# EAGLE board laserpcbpower (EAGLE 5.11)
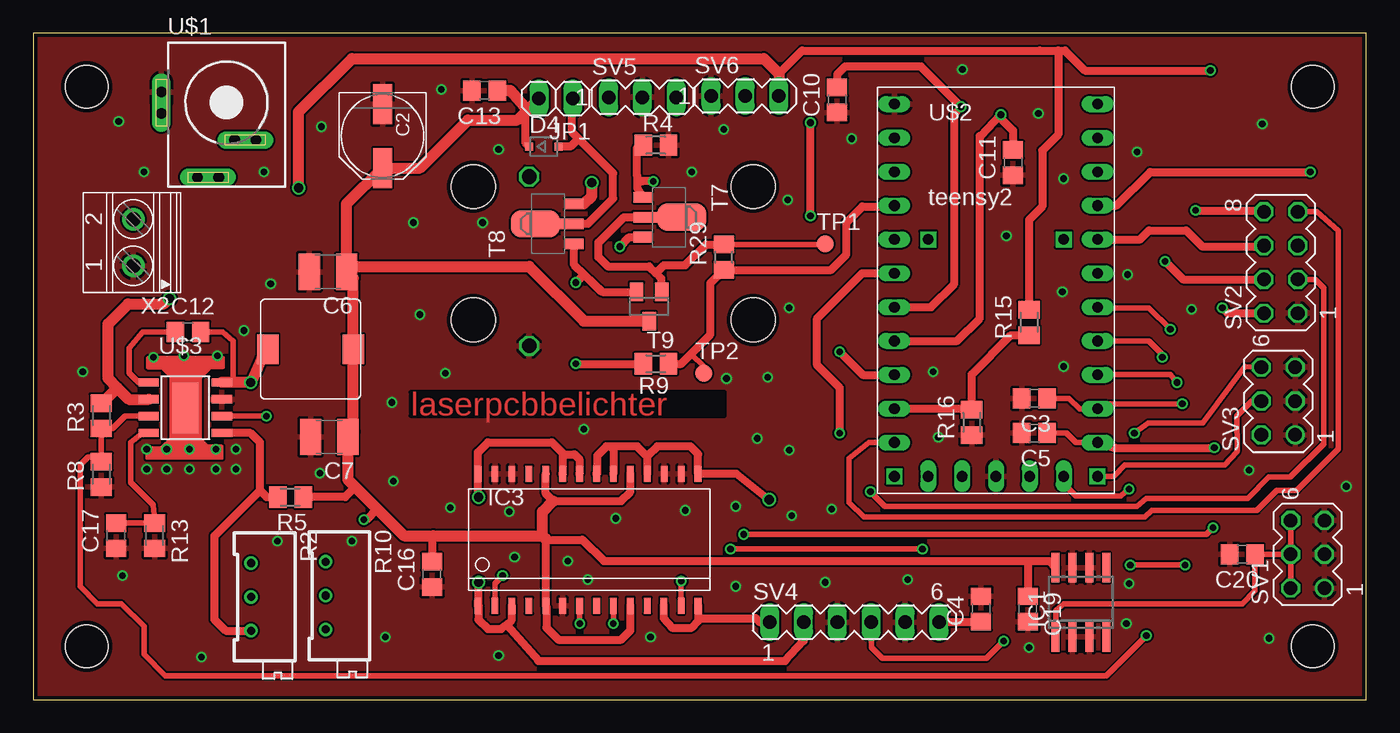
[diagram p0: board, top side]
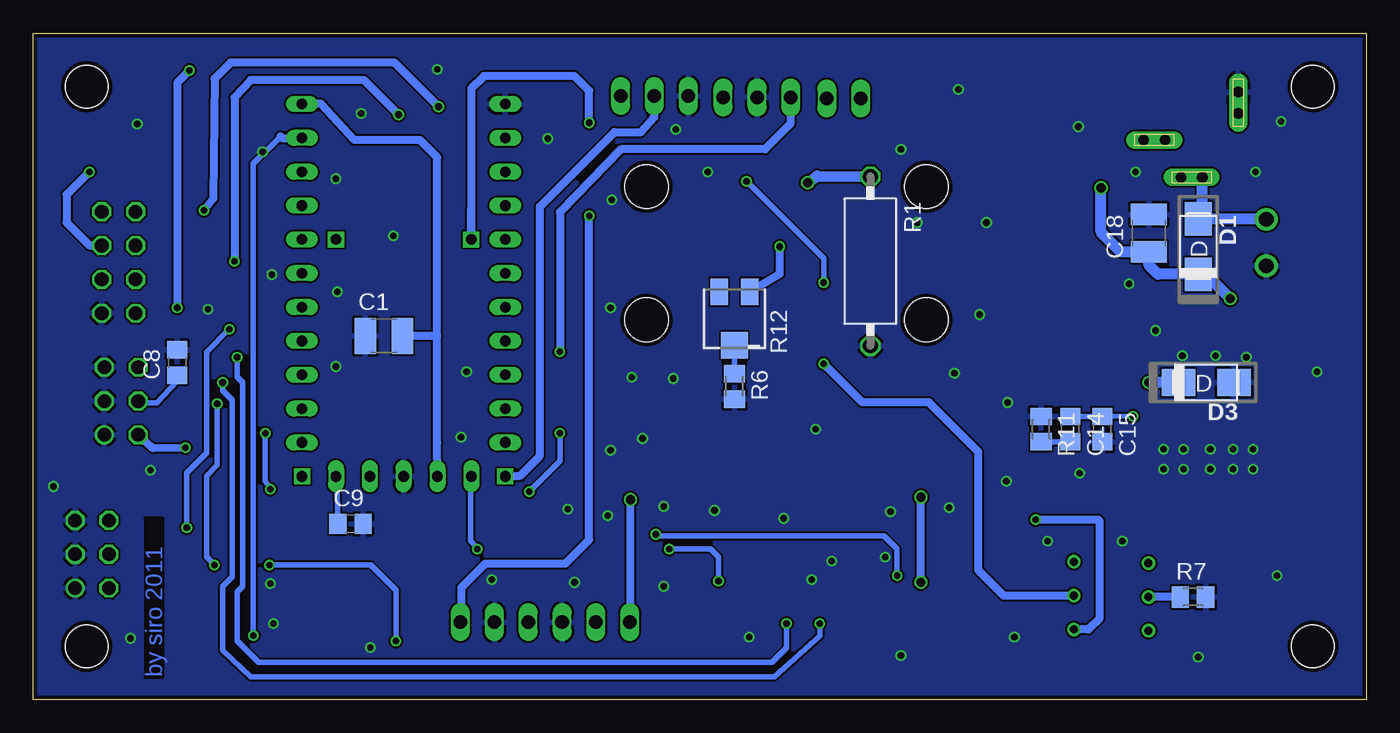
[diagram p1: board, bottom side, seen from below]

Size 100 x 50 mm. Coordinates in mm from the lower left corner, seen from the top.
Outline: 0,0 100,0 100,50 0,50 0,0
Copper layers (1*16): Top 0.035mm / dielectric 1.5mm / Bottom 0.035mm
Design rules "PCB-POOL Standard": minimum track width 0.15mm, minimum drill 0.3mm, track to track 0.15mm, track to pad 0.15mm, pad to pad 0.15mm, via to via 0.15mm, smd to smd 0.15mm, copper to edge 0.3mm, drill to drill 0.2mm, minimum pad ring 0.2mm, minimum via ring 0.15mm, stop-mask expansion 0.075mm, vias tented up to drill 0mil, thermal gap 0.2mm
Holes 3.2 mm at 96,4 96,46 4,46 4,4
Holes 3.3 mm at 33,28.5 33,38.5 54,38.5 54,28.5

## Footprints (pad centres in the part's own frame; a part is rotated, then mirrored left to right if it is on the bottom)
C1210 = smd 1.6 x 2.7: 1 -1.4,0; 2 1.4,0
PANASONIC_D = smd 3 x 1.4: + 2.4,0; - -2.4,0
C0805 = smd 1.3 x 1.5: 1 -0.95,0; 2 0.95,0
DSMA = smd 2.5 x 2: A -2.083,0; C 2.083,0
SOD323-R = smd 0.6 x 0.6: A 1.1,0; C -1.1,0
SO08 = smd 0.6 x 2.2: 1 -1.905,-2.6; 2 -0.635,-2.6; 3 0.635,-2.6; 4 1.905,-2.6; 5 1.905,2.6; 6 0.635,2.6; 7 -0.635,2.6; 8 -1.905,2.6
P-DSO-28-14 = smd 0.5 x 1.2: P$1 -8.34,-4.95; P$2 -7.07,-4.95; P$3 -5.8,-4.95; P$4 -4.53,-4.95; P$5 -3.26,-4.95; P$6 -1.99,-4.95; P$7 -0.72,-4.95; P$8 0.55,-4.95; P$9 1.82,-4.95; P$10 3.09,-4.95; P$11 4.36,-4.95; P$12 5.59,-4.95; P$13 6.9,-4.95; P$14 8.17,-4.95; P$15 8.17,4.95; P$16 6.9,4.95; P$17 5.63,4.95; P$18 4.36,4.95; P$19 3.09,4.95; P$20 1.82,4.95; P$21 0.55,4.95; P$22 -0.72,4.95; P$23 -1.99,4.95; P$24 -3.26,4.95; P$25 -4.53,4.95; P$26 -5.8,4.95; P$27 -7.07,4.95; P$28 -8.34,4.95
1X02 = drill 1.016 long: 1 -1.27,0; 2 1.27,0
PIS28XX = smd 1.6 x 2.2: 1 -3.2,0; 2 3.2,0
VMTB60 = drill 1.1 octagon: 1 -6.35,0; 2 6.35,0
RTRIM64X = drill 0.61 round: 1 1.27,-2.54; 2 1.27,0; 3 1.27,2.54
M0805 = smd 1.3 x 1.6: 1 -0.95,0; 2 0.95,0
SM-42/43A = smd 2 x 1.3: 1 2,1.15; 3 2,-1.15 | smd 2 x 2: 2 -2,0
R0805 = smd 1.3 x 1.5: 1 -0.95,0; 2 0.95,0
MA03-2 = drill 1.016 round: 1 -2.54,-1.27 | drill 1.016 octagon: 2 -2.54,1.27; 3 0,-1.27; 4 0,1.27; 5 2.54,-1.27; 6 2.54,1.27
MA04-2 = drill 1.016 octagon: 1 -3.81,-1.27; 2 -3.81,1.27; 3 -1.27,-1.27; 4 -1.27,1.27; 5 1.27,-1.27; 6 1.27,1.27; 7 3.81,-1.27; 8 3.81,1.27
MA06-1 = drill 1.016 long: 1 -6.35,0; 2 -3.81,0; 3 -1.27,0; 4 1.27,0; 5 3.81,0; 6 6.35,0
MA03-1 = drill 1.016 long: 1 -2.54,0; 2 0,0; 3 2.54,0
SOT89-BCE = smd 0.8 x 1.4: B -1.499,-1.981; E 1.499,-1.981 | smd 0.8 x 1.9: C 0,-1.727 | smd 2.032 x 3.65: C@1 0,0.94
SOT23 = smd 1 x 1.4: 1 -0.95,-1.1; 2 0.95,-1.1; 3 0,1.1
B1,27 = smd 1.27 x 1.27: TP 0,0
KLDVX-0202-B = drill 0.8 pad 1.4 long: 1 -4.9,0.8; 1@1 -4.9,-0.8 | drill 0.8 pad 1.3 long: 2 -2.2,-5.6; 2@1 -0.6,-5.6; 3 0.6,-2.8; 3@1 2.2,-2.8
TEENSY2 = drill 0.8 long: GND 12.7,21.59; PB0 12.7,19.05; PB1 12.7,16.51; PB2 12.7,13.97; PB3 12.7,11.43; PB4 27.94,-1.27; PB5 27.94,1.27; PB6 27.94,3.81; PB7 12.7,8.89; PC6 12.7,-3.81; PD0 12.7,6.35; PD1 12.7,3.81; PD2 12.7,1.27; PD3 12.7,-1.27; PD4 25.4,-6.35; PD5 15.24,-6.35; PD7 27.94,-3.81; PF0 27.94,19.05; PF1 27.94,16.51; PF4 27.94,13.97; PF5 27.94,11.43; PF6 27.94,8.89; PF7 27.94,6.35; PGND2 20.32,-6.35; PVCC2 17.78,-6.35; RST 22.86,-6.35; VCC 27.94,21.59 | drill 0.8 square: PAREF 25.4,11.43; PC7 12.7,-6.35; PD6 27.94,-6.35; PE6 15.24,11.43
SO8-COOL = smd 0.61 x 1.524: 1 -1.905,-2.743; 2 -0.635,-2.743; 3 0.635,-2.743; 4 1.905,-2.743; 5 1.905,2.743; 6 0.635,2.743; 7 -0.635,2.743; 8 -1.905,2.743 | smd 3.81 x 1.93: EXT 0,0
1751248 = drill 1.1 pad 1.7 round: 1 -1.75,-0.1; 2 1.75,-0.1

## Placement (x,y rotation side)
C1  X5R-G1210 22  [C1210]  73.7,27.3 0 bottom
C2  22µ  [PANASONIC_D]  26.2,42.3 270 top
C3  100n  [C0805]  75.1,22.6 180 top
C4  100n  [C0805]  71.1,6.8 90 top
C5  100n  [C0805]  75.1,20 180 top
C6  22µ X7R  [C1210]  22.1,32.1 180 top
C7  22µ X7R  [C1210]  22.2,19.7 180 top
C8  100n  [C0805]  89.2,25.3 90 bottom
C9  100n  [C0805]  76.2,13.2 0 bottom
C10  100n  [C0805]  60.3,45 90 top
C11  100n  [C0805]  73.5,40.3 90 top
C12  100n  [C0805]  11.6,27.6 0 top
C13  X5R-G0805 100n  [C0805]  33.85,45.7 180 top
C14  180p  [C0805]  22.2,20.3 270 bottom
C15  12p  [C0805]  19.8,20.3 270 bottom
C16  100n  [C0805]  29.9,9.4 90 top
C17  15n  [C0805]  6.2,12.3 90 top
C18  10µ X7R  [C1210]  16.3,35 90 bottom
C19  100n  [C0805]  74.6,6.8 270 top
C20  100n  [C0805]  90.7,10.9 180 top
D1  [DSMA]  12.6,34 270 bottom
D3  B320A  [DSMA]  12,23.8 180 bottom
D4  ES2D  [SOD323-R]  38.3,41.5 0 top
IC1  78L05SMD  [SO08]  78.6,7.3 0 top
IC3  BTS7741G  [P-DSO-28-14]  41.7,12 0 top
JP1  laser  [1X02]  39.2,45.1 180 top
L1  > 8µ2  [PIS28XX]  20.8,26.3 180 top
R1  PT2.0YCT-ND - 2ohm  [VMTB60]  37.2,32.9 270 bottom
R2  2k  [RTRIM64X]  17.6,7.7 180 top
R3  348k  [M0805]  5.1,21.3 90 top
R4  1k  [M0805]  46.7,41.6 0 top
R5  10k  [M0805]  19.3,15.2 180 top
R6  2  [M0805]  47.4,23.5 270 bottom
R7  820  [M0805]  13,7.7 0 bottom
R8  37k5  [M0805]  5.1,16.9 90 top
R9  700  [M0805]  46.7,25.2 180 top
R10  100k - PV36X104  [RTRIM64X]  23.2,7.8 180 top
R11  93k  [M0805]  24.4,20.3 270 bottom
R12  100 - ST32ETB101  [SM-42/43A]  47.4,28.6 90 bottom
R13  75k  [M0805]  9.1,12.3 270 top
R15  47k  [M0805]  74.7,28.3 90 top
R16  210k  [M0805]  70.4,20.8 90 top
R29  1  [R0805]  51.8,33.2 90 top
SV1  [MA03-2]  95.6,10.9 90 top
SV2  leds&buttons  [MA04-2]  93.6,32.8 90 top
SV3  lightbarriers  [MA03-2]  93.4,22.4 90 top
SV4  rotary&dcmotor  [MA06-1]  61.6,5.8 0 top
SV5  lasersync  [MA03-1]  45.7,45.2 0 top
SV6  deflectionmotor  [MA03-1]  53.4,45.3 0 top
T7  BDP948  [SOT89-BCE]  47.7,36.2 270 top
T8  BDP948  [SOT89-BCE]  38.6,35.7 90 top
T9  BC847  [SOT23]  46.2,29.5 180 top
TP1  TPB1,27  [B1,27]  59.4,34.2 0 top
TP2  TPB1,27  [B1,27]  50.3,24.5 0 top
U$1  KLDVX-0202-B  [KLDVX-0202-B]  14.5,44.8 0 top
U$2  TEENSY2-CC-VERSION  [TEENSY2]  51.9,23.1 0 top
U$3  TPS54332  [SO8-COOL]  11.4,21.9 270 top
X2  1751248  [1751248]  7.4,34.3 90 top

## Library data of the parts
C1-C20 R1-R3 R5-R8 R10 R11 R13 R15 R16 R29 = rcl
D1 D3 = diodes
D4 = diode
IC1 = linear
IC3 U$3 = Labor
JP1 = pinhead
L1 = Inductor-Fastron
R4 R9 = resistor
R12 = pot
SV1-SV6 = con-lstb; OC_FARNELL: unknown; OC_NEWARK: unknown
T7-T9 = transistor
TP1 TP2 = testpad
U$1 = con-kycon; OC_FARNELL: unknown; OC_NEWARK: unknown
U$2 = teensy2
X2 = con-phoenix-350; OC_FARNELL: unknown; OC_NEWARK: unknown

## Nets
FREQ_IN: SV6.2 U$2.PC7
GND: C1.1 C2.- C3.2 C4.2 C5.2 C6.2 C7.2 C8.2 C9.2 C10.1 C11.1 C13.2 C15.2 C16.1 C17.1 C18.2 C19.2 C20.2 D3.A IC1.2 IC1.3 IC1.6 IC1.7 IC3.P$6 IC3.P$16 IC3.P$17 IC3.P$26 IC3.P$27 R1.2 R4.2 R6.2 R7.2 R8.1 R11.1 R13.2 R16.1 SV1.1 SV1.3 SV1.5 SV2.1 SV3.1 SV3.3 SV3.5 SV4.3 SV4.5 SV5.2 SV6.1 U$1.1 U$2.GND U$2.PGND2 U$3.7 U$3.EXT X2.1
HSYNC: SV5.1 U$2.PD2
IH1: IC3.P$7 U$2.PB5
IH2: IC3.P$9 U$2.PB6
IL1: IC3.P$2 U$2.PF7
IL2: IC3.P$13 U$2.PD5
KEY_ON: C10.2 SV2.8 U$2.PD0
KEY_START: C11.2 SV2.4 U$2.PD1
LASER_SUPPLY_EN: R3.1 R8.2 U$2.PF0 U$3.3
LED_CALIBRATING: SV2.7 U$2.PC6
LED_READY: SV2.3 U$2.PB7
LED_RUNNING: SV2.6 U$2.PF5
LED_USBON: SV2.5 U$2.PF4
LS_END: C8.1 SV3.4 U$2.PD6
LS_OPEN: C5.1 SV3.2 U$2.PD7
LS_START: C9.1 SV3.6 U$2.PD4
MOTOR_A: IC3.P$1 IC3.P$3 IC3.P$22 IC3.P$23 IC3.P$28 SV4.2
MOTOR_B: IC3.P$12 IC3.P$14 IC3.P$15 IC3.P$18 IC3.P$20 IC3.P$21 SV4.1
N$1: R1.1 T8.E
N$2: R2.2 R7.1
N$4: C14.1 C15.1 U$3.6
N$5: C14.2 R11.2
N$6: D1.A U$1.2 X2.2
N$7: C12.1 U$3.1
N$8: C12.2 D3.C L1.2 U$3.8
N$9: R2.3 R5.2 U$3.5
N$10: R4.1 T7.B T8.B T9.2
N$11: C20.1 IC1.1 SV1.2 SV1.4 SV1.6
N$13: C17.2 R13.1 U$3.4
N$16: R9.2 R10.2
N$18: R12.3 T7.E
N$22: R6.1 R12.2
N$36: C1.2 U$2.PVCC2 U$2.VCC
N$46: R29.2 T7.C T9.1 TP1.TP
ROT1: C4.1 SV4.6 U$2.PE6
ROT2: C3.1 SV4.4 U$2.PB4
S_DATA: R9.1 R29.1 TP2.TP U$2.PB2
ST: IC3.P$8
SUPPLY: C18.1 D1.C R3.2 R15.2 SV2.2 SV6.3 U$3.2
SUPPLY_SENSE: R15.1 R16.2 U$2.PD3
VDD_LASERSUPPLY: C2.+ C6.1 C7.1 C13.1 C16.2 C19.1 D4.C IC1.8 IC3.P$5 IC3.P$10 IC3.P$19 IC3.P$24 JP1.2 L1.1 R5.1 R10.3 T9.3
VSS_LASER: D4.A JP1.1 T8.C

## Tracks (layer width: path | path; a pad name or v marks a point on that pad's centre or on a via)
FREQ_IN
  Bottom 0.254: U$2.PC7 64.55,16.8
  Bottom 0.61: 64.55,16.8 63.5,16.8 62,18.3 62,37 56.4,42.6 54.4,42.6 53.4,43.7 SV6.2
GND  (via drill 0.5)
  other vias: 75.4,44 21.6,43 9,25.7 41.3,20.3 40.1,10.4 34.9,3.3 48.9,14.2 52,24.1 28.5,35.8 59.9,14.3 98.5,16 30.9,24.5 61.4,42.1 51.8,42.8 73,34.8 67.9,19.7 82.1,31.9 82.8,41.1 26.4,4.7 54.3,19.6 18.3,11.9 11.7,18.8 6.4,43.4 43.7,13.6 52.7,14.5 52.7,8.5 65.6,9 69.7,47.3 86.9,29.3 92.2,43.2 36.1,10.7 29,28.9 17.8,31.2 55.1,24.2 23.9,11.9 92.7,4.6 91.2,17.2 56.7,18.7 56.9,13.8 59.4,8.8 35.7,14.1 34.9,41.3 77.3,39.1 13.8,25.8 8.5,18.8 30.6,45.8 33.7,35.8 77.2,30.6 49.4,39.6 56.6,37.5 56.7,29.4 67.5,24.6 6.7,9.3 3.7,24.6 41.6,9 46.3,4.7 12.6,3.2 77.3,25 31.3,14.4 27,16.4 15.2,18.8 26.9,22.3 17.3,39.6 8.3,39.6 15.2,17.3 10,18.8 8.5,17.3 11.3,25.8 13.7,18.8 15.8,27.7 13.7,17.3 10,17.3 21.5,17 11.7,17.3 82,5.7 82.2,8.7 74.7,3.9
  pour Top: 0.1,50 0.1,0 100,0 100,50
  pour Bottom: 0,50 0,0.1 100,0.1 100,50
HSYNC  (via drill 0.5)
  Top 0.61: U$2.PD2 62.23,24.37 v60.5,26.1
  Bottom 0.254: SV5.1 43.2,45.16
  Bottom 0.61: 43.2,45.16 43.2,43.2 45.1,41.3 55.9,41.3 60.5,36.6 v60.5,26.1
IH1  (via drill 0.5)
  Top 0.406: IC3.P$7 40.98,5.72 v41,5.7 | v85.8,23.8 85.3,24.4 79.87,24.4 U$2.PB5
  Bottom 0.406: v41,5.7 41,4.8 44.4,1.7 83.7,1.7 85.8,3.7 85.8,8.5 85.1,9.2 85.1,22.5 85.8,23.2 v85.8,23.8
IH2  (via drill 0.5)
  Top 0.406: IC3.P$9 43.52,5.72 v43.5,5.7 | v84.7,25.7 84.7,25.9 83.7,26.9 U$2.PB6
  Bottom 0.406: v43.5,5.7 43.5,3.9 44.6,2.8 83.1,2.8 84.7,4.4 84.7,8.1 84.3,8.5 84.3,23.8 84.7,24.2 v84.7,25.7
IL1  (via drill 0.5)
  Top 0.406: IC3.P$2 34.63,8.73 v35.2,9.3 | v53.3,12.4 88,12.4 v88.5,12.9 | v85.3,27.8 83.7,29.4 79.89,29.4 U$2.PF7
  Bottom 0.406: v35.2,9.3 35.2,11.3 36.2,12.3 53.2,12.3 v53.3,12.4 | v88.5,12.9 88.5,17 87,18.5 87,26.1 v85.3,27.8
IL2  (via drill 0.5)
  Top 0.406: IC3.P$13 v48.6,8.9 | v52.3,11.3 v66.7,11.3
  Bottom 0.406: v48.6,8.9 48.6,10.7 49.2,11.3 v52.3,11.3 | v66.7,11.3 66.7,11.4 67.2,11.9 67.2,16.69 U$2.PD5
KEY_ON  (via drill 0.5)
  Top 0.254: 92.24,36.7 SV2.8
  Top 0.61: U$2.PD0 67.35,29.45 69.1,31.2 69.1,43.9 v69.6,44.5 66.6,47.5 60.9,47.5 60.3,46.9 C10.2 | v87.2,36.7 92.24,36.7
  Bottom 0.61: v69.6,44.5 72.9,47.8 85.2,47.8 86.4,46.6 86.5,37.6 v87.2,36.7
KEY_START  (via drill 0.5)
  Top 0.254: 71,42.3 71.1,42.3
  Top 0.61: U$2.PD1 69.31,26.91 71,28.6 71,42.3 | SV2.4 86.27,31.53 v84.9,32.9 | 71.1,42.3 v72.6,43.9 72.6,43.6 73.5,42.7 C11.2
  Bottom 0.61: v84.9,32.9 84.9,45.2 83.7,46.5 75.2,46.5 v72.6,43.9
LASER_SUPPLY_EN  (via drill 0.5)
  Top 0.406: 5.1,18.2 R8.2 | 5.1,18.2 R3.1 5.95,20.35 6.9,21.3 8.13,21.3 8.16,21.27 | 5.1,18.2 4.1,18.2 3.5,17.6 3.5,8.5 4.8,7.2 6.6,7.2 8.3,5.5 8.3,3.4 9.9,1.8 80.5,1.8 v83.5,4.8
  Top 0.61: 8.16,21.27 U$3.3
  Bottom 0.406: v83.5,4.8 83.5,40.2 81.45,42.25
  Bottom 0.61: U$2.PF0 81.35,42.15 81.45,42.25
LED_CALIBRATING
  Top 0.254: U$2.PC6
  Top 0.406: SV2.7 96.29,36.61 97.9,35.2 97.9,18.8 94.8,15.7 93.3,15.7 91.8,14.2 83.9,14.2 83.4,13.7 62.3,13.7 61.2,14.8 61.2,18.1 62.7,19.3 U$2.PC6
LED_READY  (via drill 0.5)
  Top 0.406: SV2.3 96.17,31.53 96.8,30.9 96.8,19.2 94.3,16.7 92.7,16.7 91.1,15.1 83.5,15.1 82.8,14.5 63.9,14.5 v62.8,15.6 | 63.6,32 U$2.PB7
  Top 0.61: 60.5,20.3 v60.5,20 60.5,23.4 58.8,25.1 58.8,28.6 62.2,32 63.6,32
  Bottom 0.406: v62.8,15.6 60.5,17.9 v60.5,20
LED_RUNNING
  Top 0.61: U$2.PF5 83.03,34.53 83.7,35.2 86.5,35.2 87.7,34 92.26,34 SV2.6
LED_USBON  (via drill 0.5)
  Top 0.61: U$2.PF4 81.27,37.07 83.8,39.6 v95.8,39.6
  Bottom 0.61: SV2.5 95.77,34.07 97.5,35.8 97.5,37.9 v95.8,39.6
LS_END
  Top 0.254: 90.3,18.6 90.33,18.7
  Top 0.406: U$2.PD6 81.05,16.75 81.9,17.6 89.4,17.6 90.3,18.6 | 90.33,18.7 90.3,21.3 91.4,22.4 SV3.4
  Bottom 0.406: C8.1 89.2,23.9 90.75,22.25 91.98,22.25 SV3.4
LS_OPEN  (via drill 0.5)
  Top 0.406: C5.1 77.5,20 78.2,19.3 U$2.PD7
  Top 0.61: v88.6,18.9 81.15,18.9 U$2.PD7
  Bottom 0.61: SV3.2 91.04,18.86 v88.6,18.9
LS_START  (via drill 0.5)
  Top 0.406: SV3.6 90.9,25 87.74,20.74 83.64,20.74 v82.6,20 | U$2.PD4 77.3,16.2 78.2,15.3 81.6,15.3 v82.2,15.8
  Bottom 0.406: v82.6,20 82.6,16.4 v82.2,15.8 | C9.1 77.2,16.65 U$2.PD4
MOTOR_A  (via drill 0.7)
  Top 0.61: 33.4,7.4 33.36,7.36 IC3.P$1 33.4,7.09 | 33.4,7.09 33.4,6 34.1,5.3 35.1,5.3 35.5,5.6 | 35.5,5.6 35.9,6 IC3.P$3 | 39.7,18.5 38.9,19.3 34.1,19.3 33.36,18.56 IC3.P$28 33.36,15.44 v33.4,15.2 | 39.7,18.5 IC3.P$23 | IC3.P$22 40.98,18.02 40.6,18.4 39.8,18.4 39.7,18.5 | 33.4,7.09 33.4,7.4 | 33.4,7.4 v33.4,8.8 | SV4.2 57.79,4.39 56.4,2.9 37.9,2.9 35.5,5.6
  Bottom 0.61: v33.4,8.8 v33.4,15.2
MOTOR_B  (via drill 0.7)
  Top 0.61: IC3.P$12 47.29,6.11 47.9,5.4 49.4,5.4 49.9,5.9 49.9,6.1 | 49.9,6.1 49.9,7.02 IC3.P$14 | 49.9,6.1 54.2,6.1 54.5,5.8 SV4.1 55.1,5.95 | 46.06,18.24 IC3.P$18 | 46.06,18.24 45.3,19 43.3,19 | 43.3,19 43,19 42.3,18.3 42.3,17 IC3.P$21 | 46.06,18.24 46.82,19 49.3,19 49.87,18.43 IC3.P$15 52.75,16.95 v55.2,15 | IC3.P$20 43.52,18.78 43.3,19
  Bottom 0.61: v55.2,15 55.2,5.85 SV4.1
N$1  (via drill 0.7)
  Top 0.61: T8.E
  Top 0.813: v41.9,38.8 41.9,37.8 41.3,37.2 T8.E
  Bottom 0.813: R1.1 41.2,39.3 v41.9,38.8
N$2
  Bottom 0.61: R7.1 R2.2
N$4  (via drill 0.5)
  Top 0.406: U$3.6 v17.48,21.27
  Bottom 0.406: v17.48,21.27 C15.1 C14.1
N$5
  Bottom 0.406: C14.2 R11.2
N$6
  Bottom 0.813: U$1.2 12.3,36.38 D1.A 12.57,36.05 X2.2
N$7
  Top 0.406: U$3.1 7.89,23.8 7.2,24.5 7.2,26.4 8.2,27.6 C12.1
N$8  (via drill 0.7)
  Top 0.406: C12.2 14.2,27.6 15,26.9 15,24.1 14.7,23.8 | 14.7,23.8 15.3,23.8 | 14.7,23.8 U$3.8
  Top 0.61: L1.2 17.7,26.38 17.56,26.54
  Top 0.813: 17.8,26.2 17.56,26.54 16.4,23.9 v16.3,23.8 U$3.8
  Bottom 0.813: D3.C v16.3,23.8
N$9
  Top 0.61: R5.2 17.5,15.2 17,15.7 | 17,15.7 17,19.3 16.3,20 U$3.5 | R2.3 14.44,5.16 13.6,6 13.6,12.3 17,15.7
N$10  (via drill 0.5)
  Top 0.305: 45.7,37.7 T7.B | 45.3,41.45 R4.1
  Top 0.406: 42.7,30.6 42.5,30.6 41.3,31.8 41.2,31.8 | 45.7,38.9 45.3,39.3
  Top 0.61: 45.7,37.7 45.3,38.4 45.3,39.3 45.3,41.45 | T8.B 40.58,32.62 42.7,30.6 T9.2 | 41.2,31.8 v40.7,31.3 | v46.5,38.9 45.7,38.9
  Bottom 0.406: v40.7,31.3 40.7,33.1 v46.5,38.9
N$11
  Top 0.406: SV1.4 C20.1 91.65,8.15 90.7,7.2 77.3,7.2 76.7,6.7 76.7,4.8 IC1.1 | SV1.4 SV1.6 | SV1.4 SV1.2
N$13
  Top 0.406: U$3.4 8.2,20 7.3,19.3 7.3,16.3 9,14.6 9.06,13.81 R13.1 C17.2
N$16  (via drill 0.5)
  Top 0.61: v40.7,25.2 R9.2
  Bottom 0.61: R10.2 27.2,7.8 29.1,9.7 29.1,18.6 32.8,22.3 37.8,22.3 v40.7,25.2
N$18  (via drill 0.5)
  Top 0.61: T7.E 44.7,34.7 v44,34
  Bottom 0.61: v44,34 44,31.95 R12.3
N$22
  Bottom 0.406: R6.1 R12.2
N$36
  Bottom 0.61: U$2.PVCC2 69.7,19.27 69.7,27.3 | 69.7,27.3 69.7,40.7 71,42 75.9,42 78.4,44.7 U$2.VCC | 69.7,27.3 C1.2
N$46
  Top 0.406: R29.2 59.35,34.15 TP1.TP
  Top 0.61: R29.2 50.45,34.15 48.9,32.6 47.3,32.6 46.7,32 | T7.C 44.3,36.2 42.4,34.3 42.4,33.2 43.1,32.5 46.2,32.5 46.7,32 | 46.7,32 47.1,31.6 47.1,30.65 T9.1
ROT1  (via drill 0.5)
  Top 0.61: C4.1 68,5.85 SV4.6 | v58.3,36.3 v58.3,43.3
  Bottom 0.61: 67.14,36.86 U$2.PE6 67.14,45.86 66.2,46.8 59.4,46.8 58.3,45.7 v58.3,43.3 | v58.3,36.3 58.3,12 60.1,10.2 66.1,10.2 67.9,8.4 67.9,5.85 SV4.6
ROT2  (via drill 0.5)
  Top 0.406: C3.1 77.7,22.6 78.5,21.8 79.84,21.8 U$2.PB4 80.21,22.2 v86.2,22.2 | SV4.4 62.87,3.93 63.7,3.1 71.5,3.1 v72.8,4.4 | v82.3,10.1 v86.4,10.1
  Bottom 0.406: v72.8,4.4 72.8,8.2 74.7,10.1 v82.3,10.1 | v86.4,10.1 87,10.7 87,16.8 86.2,17.6 v86.2,22.2
S_DATA
  Top 0.254: U$2.PB2 64.57,37.1
  Top 0.406: TP2.TP 50.3,25 49.35,25.95
  Top 0.61: R9.1 48.6,25.2 49.35,25.95 50.8,27.4 50.8,31.25 R29.1 59.85,32.25 61,33.4 61,35.8 62.2,37 64.53,37 U$2.PB2
SUPPLY  (via drill 0.5, 0.7)
  Top 0.61: SV2.2 89.61,28.99 v89.2,29.4 | v88.3,47.2 78.9,47.2 77.4,48.7 76.9,48.7 | 55.94,46.96 57.68,48.7 75.5,48.7 76.9,48.7 | R15.2 74.7,36 75.7,37 75.7,41.2 76.9,42.4 76.9,48.7
  Top 0.813: R3.2 5.38,22.54 5.43,22.54 6.3,23.4 | U$3.2 7.17,22.54 6.3,23.4 | 6.3,23.4 5.6,24.1 5.6,28.2 7.1,29.7 9.8,29.7 v10.2,30.1 | SV6.3 55.94,46.96 54.8,48.1 23.9,48.1 19.9,44.1 v19.9,38.4
  Bottom 0.61: v89.2,29.4 89.2,46.3 v88.3,47.2
  Bottom 0.813: v10.2,30.1 11.9,31.8 12.48,31.8 D1.C 15.62,31.92 16.3,32.6 C18.1 18.4,33.6 19.9,35.1 v19.9,38.4
SUPPLY_SENSE
  Top 0.61: U$2.PD3 70.32,21.83 R16.2 70.4,24.4 73.35,27.35 R15.1
VDD_LASERSUPPLY  (via drill 0.5)
  Top 0.61: 37.06,44.23 36.9,44.07 36.9,41.8 D4.C | IC3.P$10 44.79,5.19 44.1,4.5 39.4,4.5 38.5,5.4 38.5,6.99 IC3.P$5 38.44,12 | IC3.P$24 38.44,15.46 39,14.9 44.1,14.9 44.8,15.6 IC3.P$19 | 38.44,12.06 38.44,12 | v24.8,13.5 25,13.5 25.8,14.3 | 38.44,12 41.2,12 42.8,10.4 74.7,10.4 | C16.2 29.9,12.2 30,12.3 | R5.1 23.4,15.2 24.15,15.95 | 74.7,10.4 76.19,10.4 IC1.8 | C19.1 74.6,10.3 74.7,10.4
  Top 0.813: C6.1 24,31.6 L1.1 24,20.1 C7.1 23.6,16.5 24.15,15.95 25.8,14.3 27.8,12.3 30,12.3 38.2,12.3 | T9.3 41.3,28.4 37.2,32.5 23.9,32.5 C6.1 | C6.1 23.5,37.2 C2.+ 29,39.9 32.6,43.5 36.33,43.5 37.06,44.23 | 37.06,44.23 JP1.2 | C13.1 35.8,45.7 37.06,44.23 | 38.2,12.3 38.44,12.06 | 38.2,12.3 38.2,14.1 39,14.9
  Bottom 0.61: v24.8,13.5 20.1,13.5 20,13.4 20,6.1 20.84,5.26 R10.3
VSS_LASER
  Top 0.61: 40.4,45.03 40.4,42.6 40.9,42.1 | 40.9,42.1 43.5,39.5 43.5,37.6 41.6,35.7 T8.C | D4.A 40.3,41.5 40.9,42.1
  Top 0.813: 40.4,45.03 JP1.1

## Text on the board
Top: laserpcbbelichter
Bottom: by siro 2011